# Altium PCB STM32F334R8T6-Module.PcbDoc
Units mm, origin at the board's own origin, x right, y up, seen from the top; angles counter-clockwise.
Board outline 37.95 x 40.32 mm, 2 copper layers (Top Layer, Bottom Layer); 20 components, 61 nets, 173 pads, 15 vias.
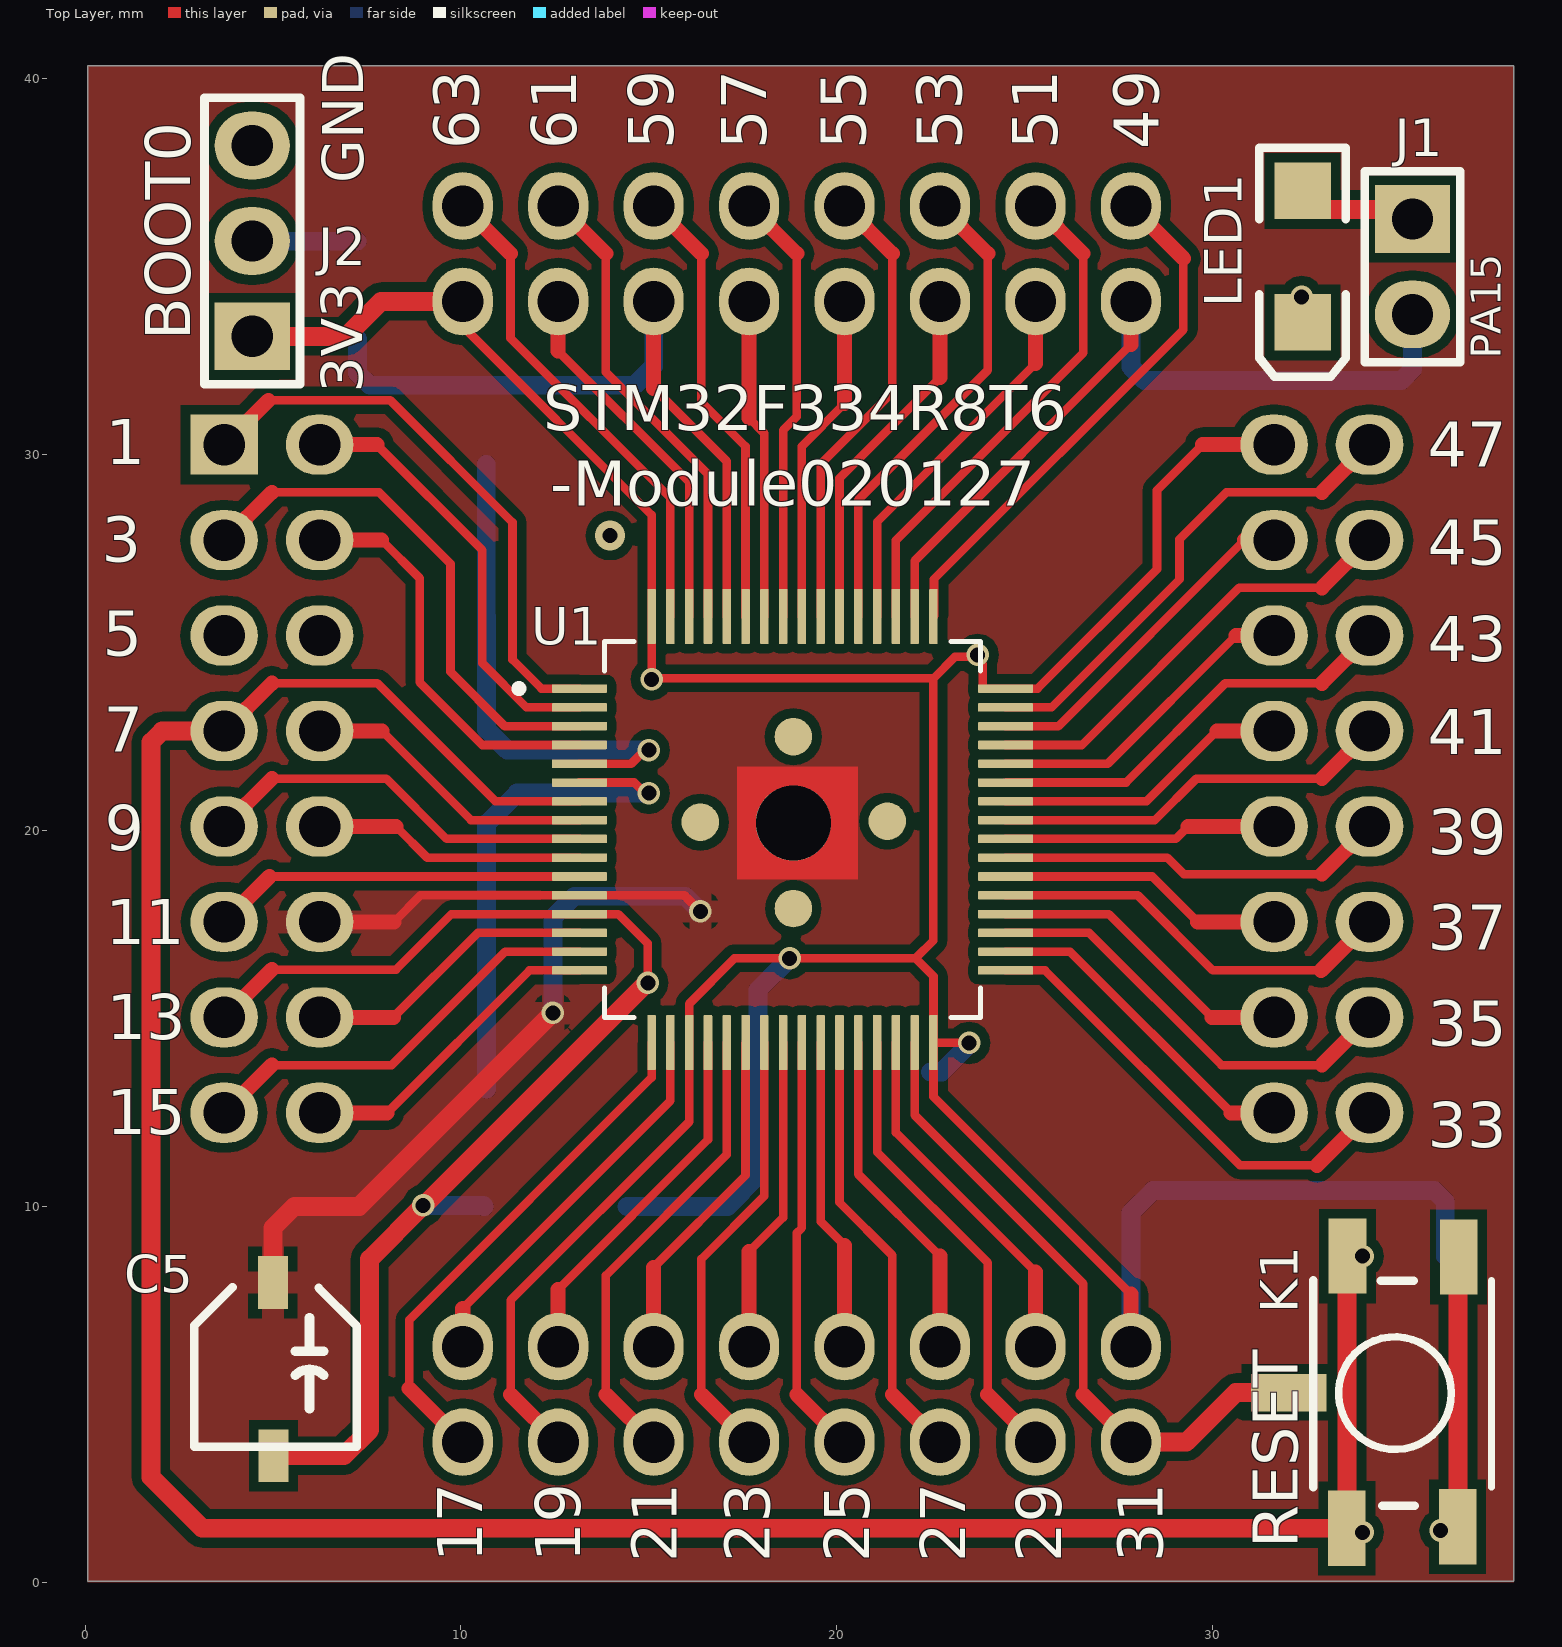
[diagram p0: Top Layer view]
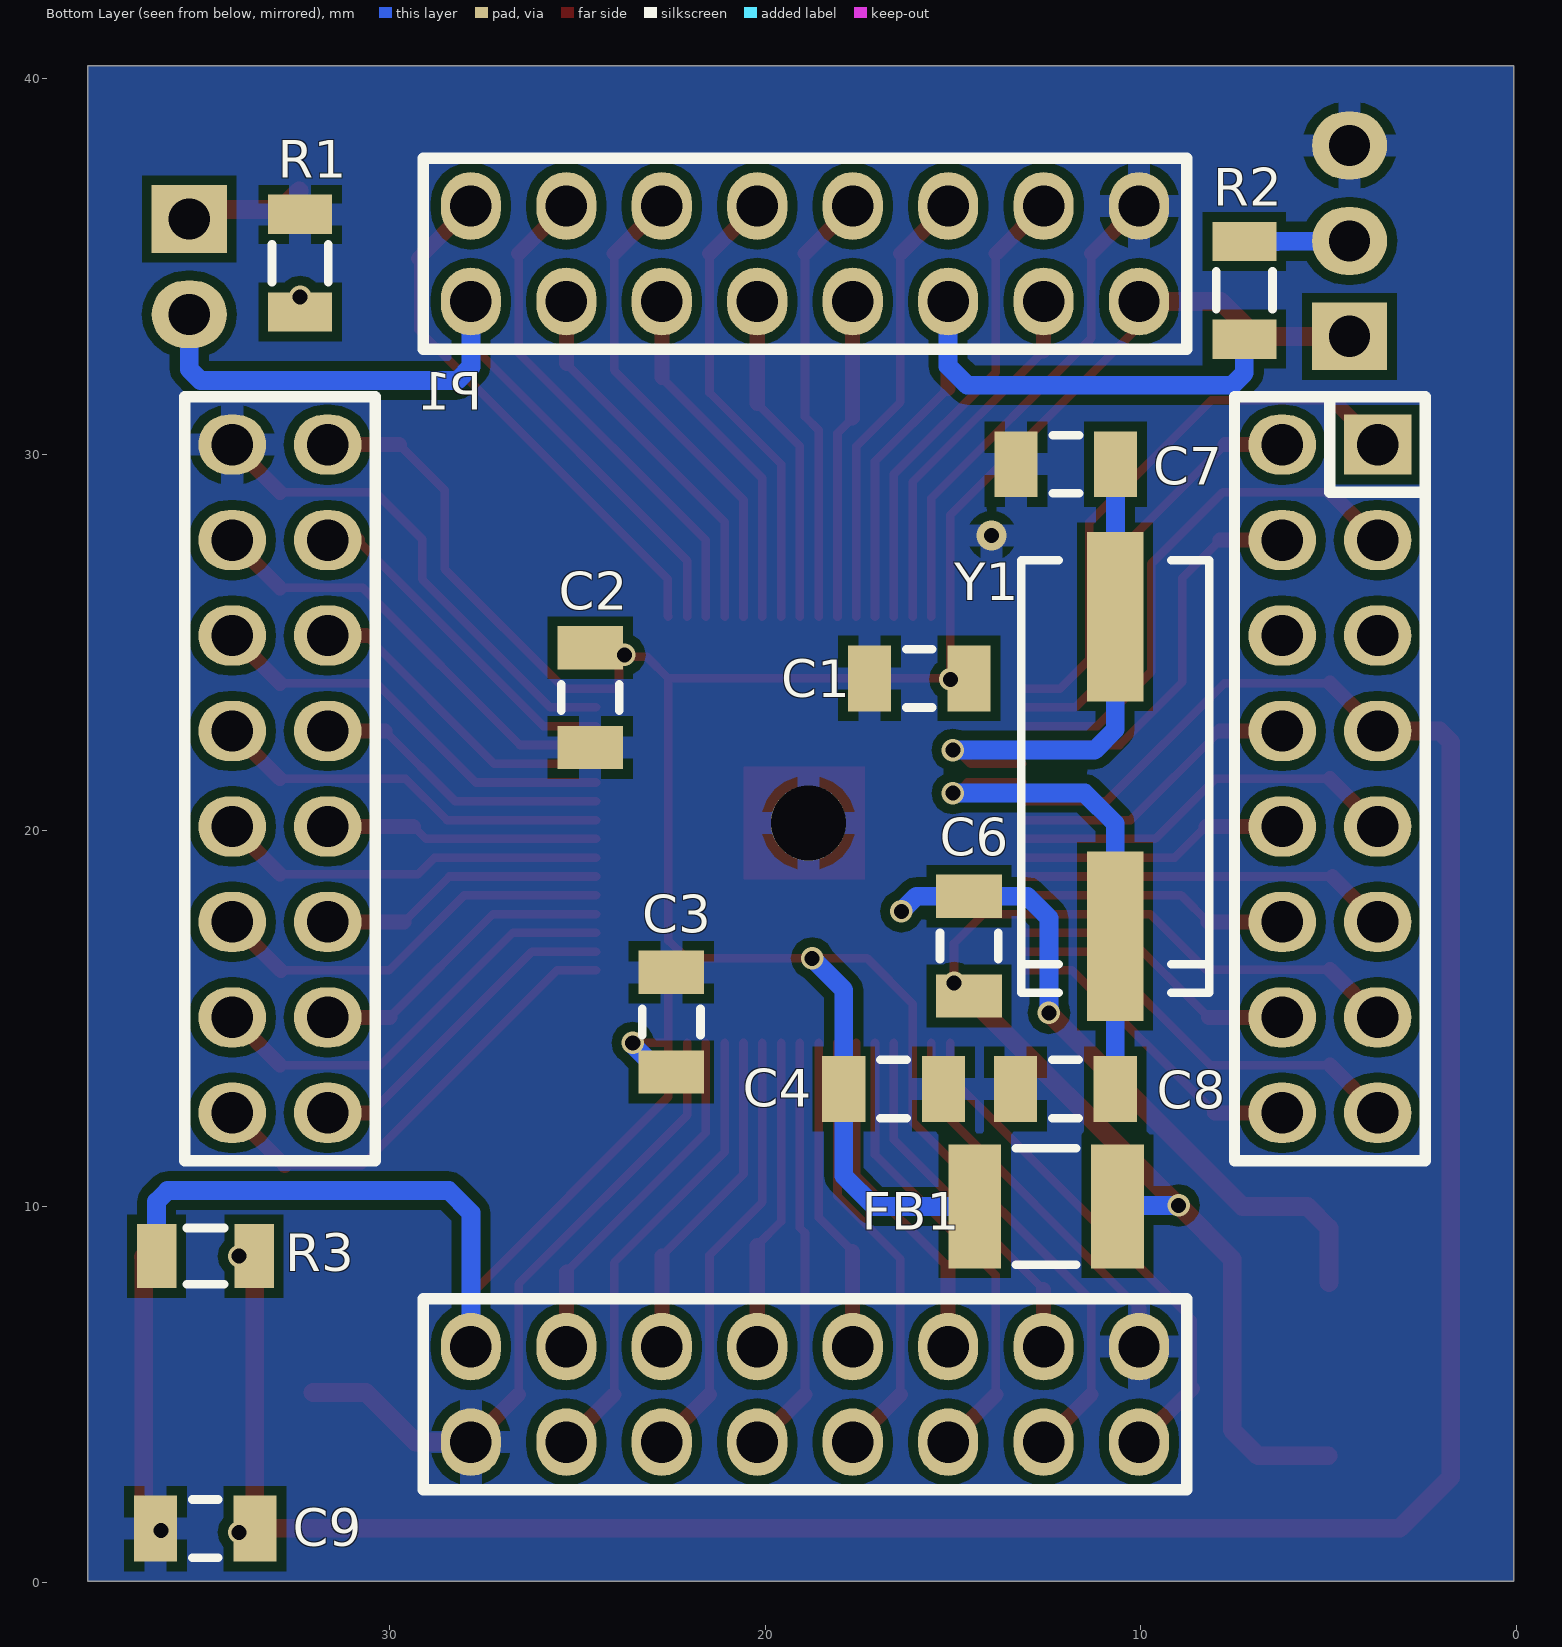
[diagram p1: Bottom Layer view, seen from below]
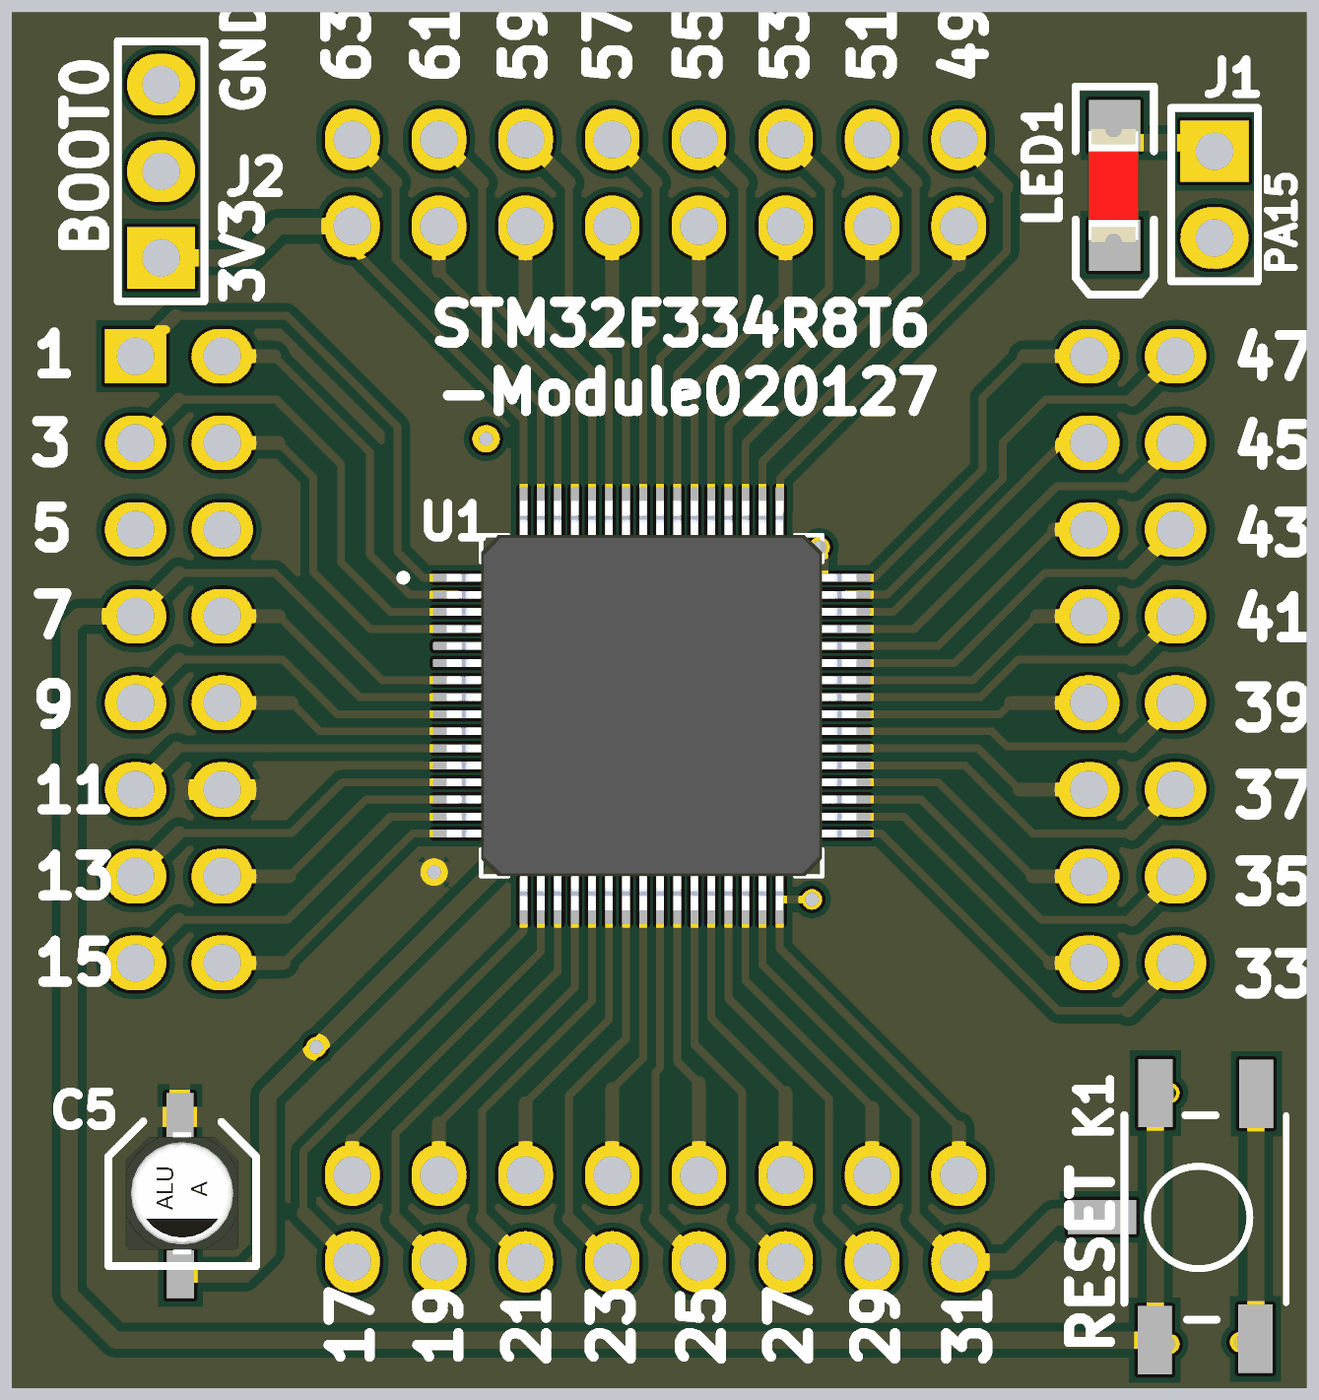
[diagram p2: 3D render of the assembled board from above, using the file's embedded part models]
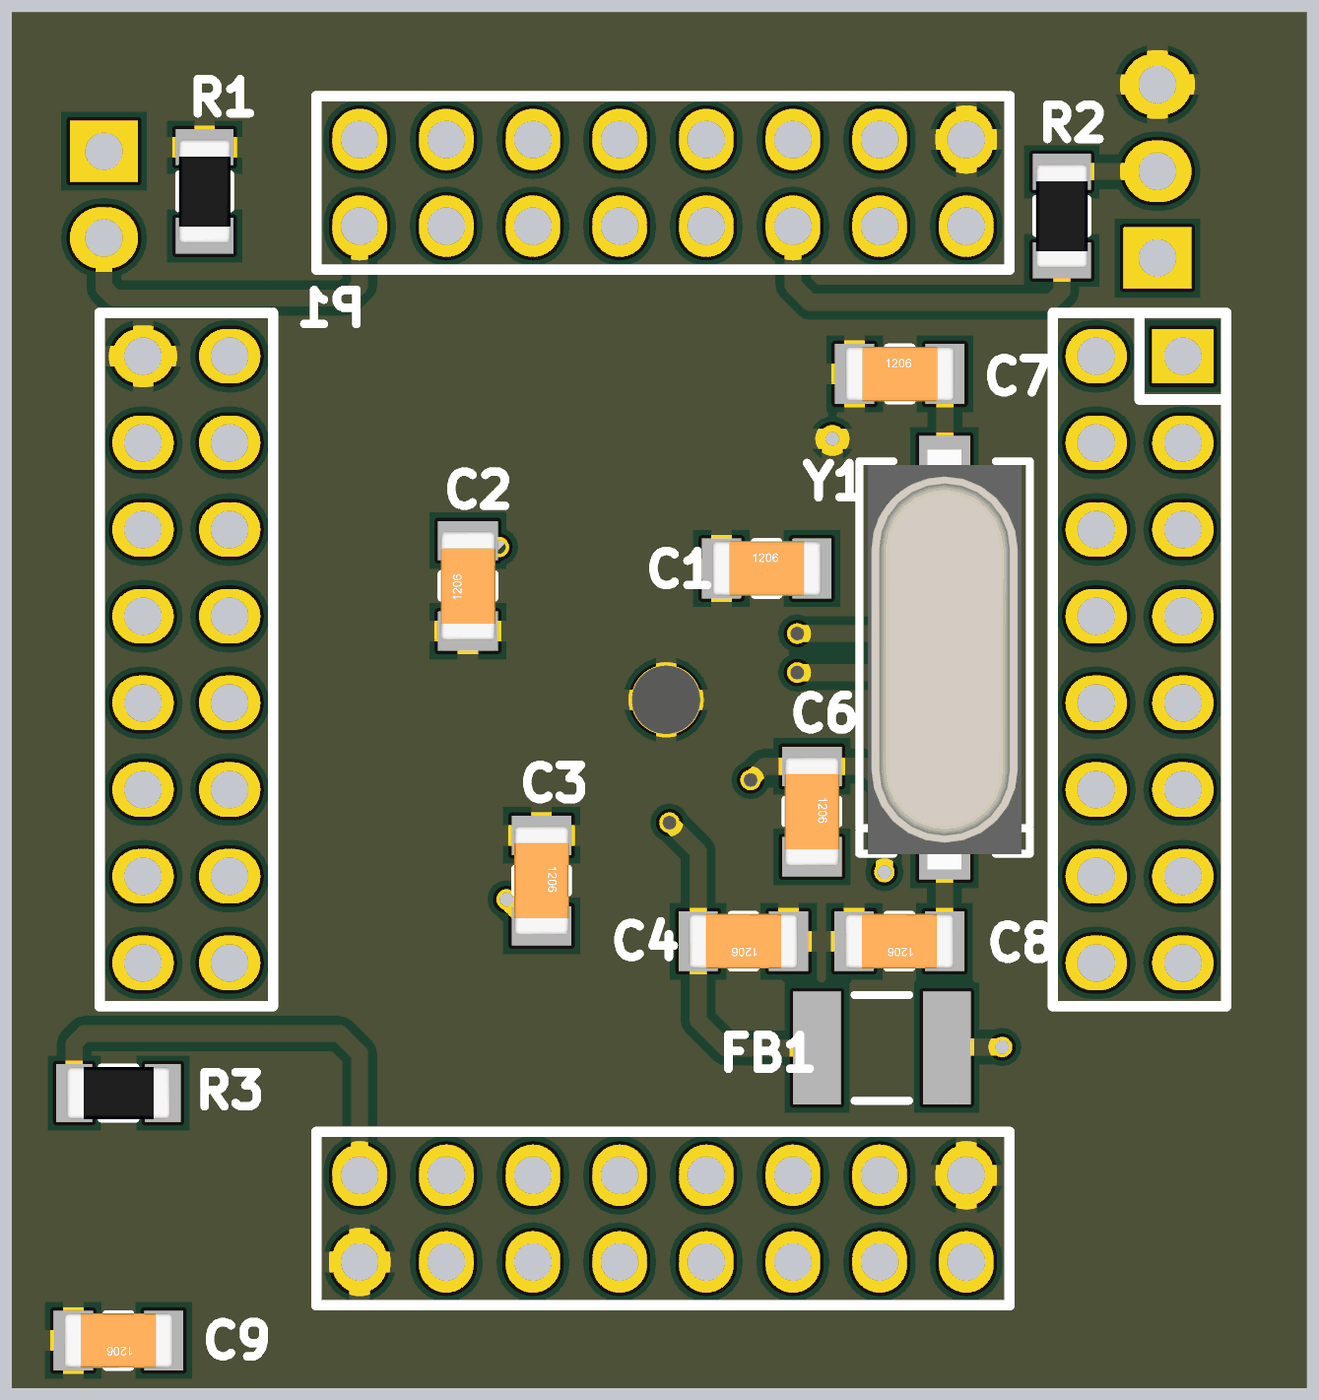
[diagram p3: 3D render of the assembled board from below, using the file's embedded part models]

## Layer stack, top to bottom
Top Solder: solder mask 0.0102, Solder Resist, Dk 3.5
Top Layer: signal copper 0.0356
Dielectric 1: dielectric 0.32, FR-4, Dk 4.8
Bottom Layer: signal copper 0.0356
Bottom Solder: solder mask 0.0102, Solder Resist, Dk 3.5

## Board outline
0.075,0.025 38.025,0.025 38.025,40.35 0.075,40.35

## Design rules (kind name [scope] priority, off if disabled: settings)
Clearance Clearance_2 [InNamedPolygon('Bottom Layer-GND')] p1: gap=0.254 ignorepadtopadclearanceinfootprint=FALSE except(0: Arc-Hole Track-Hole SMDPad-Hole THPad-Hole Via-Hole Fill-Hole Poly-Hole Region-Hole Text-Hole)
Clearance Clearance_1 [InNamedPolygon('Bottom Layer-GND')] p2: gap=0.254 ignorepadtopadclearanceinfootprint=FALSE except(0: Arc-Hole Track-Hole SMDPad-Hole THPad-Hole Via-Hole Fill-Hole Poly-Hole Region-Hole Text-Hole)
Clearance [All] p3: gap=0.254 ignorepadtopadclearanceinfootprint=FALSE except(0: Arc-Hole Track-Hole SMDPad-Hole THPad-Hole Via-Hole Fill-Hole Poly-Hole Region-Hole Text-Hole)
PlaneConnect [All] p1: planeconnectstyle=Relief reliefexpansion=0.508 reliefentries=4 reliefconductorwidth=0.6 reliefairgap=0.254
PolygonConnect [All] p1: connectstyle=Relief reliefconductorwidth=0.6 reliefentries=4 polygonreliefangle="90 Angle" airgapwidth=0.254
RoutingVias [All] p1: holewidth=0.711 width=1.27 viastyle="Through Hole" minholewidth=0.711 minwidth=1.27 maxholewidth=0.711 maxwidth=1.27
SolderMaskExpansion [All] p1: expansion=0.102
Width [All] p1: maxlimit=0.5 minlimit=0.2 preferedwidth=0.3 minimp=50.000000 maximp=50.000000 favimp=50.000000
29 further rules are at their usual default settings.

## Components (designator, comment, footprint, x,y, rotation, side; value= is the part's Value field where it differs from the comment)
C1 "Comment" "CAP 1206 (3216X15L)" 15.9,24.05 r180 bottom
C2 "Comment" "CAP 1206 (3216X15L)" 24.657,23.539 r90 bottom
C3 "Comment" "CAP 1206 (3216X15L)" 22.498,14.903 r270 bottom
C4 "Comment" "CAP 1206 (3216X15L)" 16.584,13.125 r0 bottom
C5 "10uf tantal" cap-e-2 5.09,4.585 r0 top
C6 "Comment" "CAP 1206 (3216X15L)" 14.575,16.925 r270 bottom
C7 "Comment" "CAP 1206 (3216X15L)" 12,29.75 r180 bottom
C8 "Comment" "CAP 1206 (3216X15L)" 12.012,13.125 r0 bottom
C9 "Comment" "CAP 1206 (3216X15L)" 34.9,1.425 r0 bottom
FB1 "Comment" INDC4532 12.525,10 r0 bottom
J1 "HDRM2" HDR1X2 35.325,36.275 r270 top
J2 "HDRM3" HDR1X3 4.45,33.15 r90 top
K1 "Push Button" "SW PB SMD" 33.575,8.65 r270 top
LED1 "HB" "LED SMD 1206" 32.4,35.275 r270 top
P1 "TQFP64IDC" TQFP64IDC 3.702,30.27 r0 bottom locked
R1 "1k" "RES 1206 (3216X08L)" 32.375,36.396 r270 bottom
R2 "Comment" "RES 1206 (3216X08L)" 7.25,33.079 r90 bottom
R3 "Comment" "RES 1206 (3216X08L)" 36.196,8.675 r180 bottom
U1 "STM32F334R8T6" STM32F334R8T6 11.528,23.778 r0 top
Y1 "8Mhz" "Crystal SMD" 10.687,20.872 r90 bottom

## Footprints (in the part's own frame and the unit in brackets; to place one, negate y for a bottom-side part, rotate by r counter-clockwise, add the part's x,y. Pads: shape width x height; smd on the part's side, far side on the other; paste and mask are expansions set on the pad)
"CAP 1206 (3216X15L)" [mm] "Chip Capacitor, 2-Leads, Body 3.2x1.6mm, IPC High Density"
  rect 1.15x1.75 smd: 1(-1.325,0) 2(1.325,0)
  silkscreen extent -0.35,-0.77 0.35,0.77, body extent -1.6,-0.8 1.6,0.8, height 1
cap-e-2 [mm] "1u-50v"
  rect 0.8x1.4 smd: 1(-0.075,-1.22) 2(-0.09,3.39)
  silkscreen extent -2.18,-0.98 2.14,3.26, body extent -1.68,-0.65 1.62,2.95, height 5.4
"Crystal SMD" [mm]
  rect 4.5x1.5 smd: 1(-3.683,0) 2(4.817,0)
  silkscreen extent -5.18,-2.5 6.32,2.5, body extent -5.64,-2.25 6.66,2.25, height 5.18
HDR1X2 [mm] "Connector; Header; 2 Position"
  rect 1.8x2 hole 1.1: 1(0,0)
  oval 1.8x2 hole 1.1: 2(2.54,0)
  silkscreen extent -1.27,-1.27 3.81,1.27
HDR1X3 [mm] "Connector; Header; 3 Position"
  rect 1.8x2 hole 1.1: 1(0,0)
  oval 1.8x2 hole 1.1: 2(2.54,0) 3(5.08,0)
  silkscreen extent -1.27,-1.27 6.35,1.27
INDC4532 [mm] "Chip Inductor, Body 4.5x3.2mm, IPC High Density"
  rect 1.4x3.3 smd: 1(-1.9,0) 2(1.9,0)
  silkscreen extent -0.8,-1.55 0.8,1.55, body extent -2.4,-1.7 2.4,1.7, height 0.55
"LED SMD 1206" [mm]
  rect 1.5x1.5 smd: 1(-1.75,0) 2(1.75,0)
  silkscreen extent -2.9,-1.15 3.2,1.15, body extent -1.65,-0.76 1.65,0.69, height 1.36
"RES 1206 (3216X08L)" [mm] "Chip Resistor, 2-Leads, Body 3.2x1.6mm, IPC High Density _ (0.125 W)"
  rect 1.05x1.7 smd: 1(0,0) 2(2.596,0)
  silkscreen extent 0.8,-0.75 1.8,0.75, body extent -0.23,-0.76 2.82,0.76, height 0.6
STM32F334R8T6 [mm]
  rrect25% 1.47x0.229 smd: 1(1.629,0) 2(1.629,-0.5) 3(1.629,-1) 4(1.629,-1.5) 5(1.629,-2) 6(1.629,-2.5) 7(1.629,-3) 8(1.629,-3.5) 9(1.629,-4) 10(1.629,-4.5) 11(1.629,-5) 12(1.629,-5.5) 13(1.629,-6) 14(1.629,-6.5) 15(1.629,-7) 16(1.629,-7.5) 33(12.969,-7.5) 34(12.969,-7) 35(12.969,-6.5) 36(12.969,-6) 37(12.969,-5.5) 38(12.969,-5) 39(12.969,-4.5) 40(12.969,-4) 41(12.969,-3.5) 42(12.969,-3) 43(12.969,-2.5) 44(12.969,-2) 45(12.969,-1.5) 46(12.969,-1) 47(12.969,-0.5) 48(12.969,0)
  rrect25% 0.229x1.47 smd: 17(3.549,-9.42) 18(4.049,-9.42) 19(4.549,-9.42) 20(5.049,-9.42) 21(5.549,-9.42) 22(6.049,-9.42) 23(6.549,-9.42) 24(7.049,-9.42) 25(7.549,-9.42) 26(8.049,-9.42) 27(8.549,-9.42) 28(9.049,-9.42) 29(9.549,-9.42) 30(10.049,-9.42) 31(10.549,-9.42) 32(11.049,-9.42) 49(11.049,1.92) 50(10.549,1.92) 51(10.049,1.92) 52(9.549,1.92) 53(9.049,1.92) 54(8.549,1.92) 55(8.049,1.92) 56(7.549,1.92) 57(7.049,1.92) 58(6.549,1.92) 59(6.049,1.92) 60(5.549,1.92) 61(5.049,1.92) 62(4.549,1.92) 63(4.049,1.92) 64(3.549,1.92)
  silkscreen extent -0.08,-8.75 12.3,1.25, body extent 1.3,-9.75 13.3,2.25, height 1.6
"SW PB SMD" [mm]
  rect 2x1 smd: 1(-0.005,2.975) 1(7.175,2.95) 2(-0.025,0.02) 2(7.215,0)
  rect 1x2 smd: 3(3.605,-1.545)
  silkscreen extent 0.62,-0.9 6.62,3.85
TQFP64IDC [mm]
  rect 1.8x1.6 hole 1.1: 1(0,0)
  oval 1.8x1.6 hole 1.1: 2(2.54,0) 3(0,2.54) 4(2.54,2.54) 5(0,5.08) 6(2.54,5.08) 7(0,7.62) 8(2.54,7.62) 9(0,10.16) 10(2.54,10.16) 11(0,12.7) 12(2.54,12.7) 13(0,15.24) 14(2.54,15.24) 15(0,17.78) 16(2.54,17.78) 33(30.48,17.78) 34(27.94,17.78) 35(30.48,15.24) 36(27.94,15.24) 37(30.48,12.7) 38(27.94,12.7) 39(30.48,10.16) 40(27.94,10.16) 41(30.48,7.62) 42(27.94,7.62) 43(30.48,5.08) 44(27.94,5.08) 45(30.48,2.54) 46(27.94,2.54) 47(30.48,0) 48(27.94,0)
  oval 1.6x1.8 hole 1.1: 17(6.35,26.543) 18(6.35,24.003) 19(8.89,26.543) 20(8.89,24.003) 21(11.43,26.543) 22(11.43,24.003) 23(13.97,26.543) 24(13.97,24.003) 25(16.51,26.543) 26(16.51,24.003) 27(19.05,26.543) 28(19.05,24.003) 29(21.59,26.543) 30(21.59,24.003) 31(24.13,26.543) 32(24.13,24.003) 49(24.13,-6.35) 50(24.13,-3.81) 51(21.59,-6.35) 52(21.59,-3.81) 53(19.05,-6.35) 54(19.05,-3.81) 55(16.51,-6.35) 56(16.51,-3.81) 57(13.97,-6.35) 58(13.97,-3.81) 59(11.43,-6.35) 60(11.43,-3.81) 61(8.89,-6.35) 62(8.89,-3.81) 63(6.35,-6.35) 64(6.35,-3.81)
  silkscreen extent -1.27,-7.62 31.75,27.81

## Part data
C1 C2 C3 C4 C6 C7 C8 C9: library part "Capacitor SMD"
C5: library part "Capacitor Tantalium"
FB1: library part "Ferrit Bead"
J1: library part HDR_M_1X2, "CONN, HEADER, Male, pitch: 2.54mm, 2POS"
J2: library part HDR_M_1X3, "CONN, HEADER, Male, pitch: 2.54mm, 3POS"
K1: library part "Push Kay"
LED1: library part LED, "LED", Adding Date=1387/12/22, Color=HB, Designer="Saeid Jorablo", Organazation=ControTec, Size="SMD 1206"
R1: library part R
R2 R3: library part "Resistor SMD"
U1: "No Description Available", Mfr_Name=STMicroelectronics, Copyright="Copyright (C) 2023 Ultra Librarian. All rights reserved.", Manufacturer_Part_Number=STM32F334R8T6, RefDes=RefDes, Type=DEV
Y1: library part Xtal

## Free pads (board coordinates)
  round 2 hole 2: 5(18.85,20.2)
  round 1 smd: 6(21.35,20.25) 7(18.85,22.5) 8(16.375,20.225) 9(18.85,17.925)

## Via types
v1: diameter 0.6, hole 0.4, Top Layer to Bottom Layer, 14 vias
v2: diameter 0.8, hole 0.4, Top Layer to Bottom Layer, 1 vias

## Nets (pads, with @x,y where several pads share a name; then routed paths per layer and width w, separated by ;. In a path a pad name is that pad's centre, name@x,y a point inside that pad or via, vN(x,y) a via of type N, cw(c..) or ccw(c..) an arc to the next point about the centre after c; other vN are vias at no path point)
+3V3: C1.2 C2.2 C3.2 C4.2 FB1.2 J2.1 P1.19 P1.32 P1.48 P1.64 R3.1 U1.19 U1.32 U1.48 U1.64 | length 106.8
  Top Layer w0.229: P1.64@10.052,33.423 15.077,28.398 U1.64 U1.64 v1@15.076,24.026 ; 11.325,4.994 11.325,7.5 16.077,12.252 U1.19 16.077,15.393 17.284,16.6 v1(18.75,16.6) 22.1,16.6 ; v1(15.075,24.025) v1@15.076,24.026 ; v1(23.525,14.35) 23.525,14.358 23.517,14.35 22.585,14.35 U1.32 ; 27.832,7.664 22.577,12.919 U1.32 ; 29.737,30.27 28.525,29.058 28.525,26.954 25.349,23.778 U1.48 23.905,23.778 23.891,23.792 23.891,24.426 23.75,24.567 v1(23.75,24.675) 23.7,24.625 23.15,24.625 22.575,24.05 ; v1@15.076,24.026 15.1,24.05 22.575,24.05 ; 22.1,16.6 22.575,17.075 22.575,24.05 ; 22.1,16.6 22.577,16.123 U1.32
  Top Layer w0.4: P1.64@10.052,33.423 P1.64 ; 11.325,4.994 P1.19 ; P1.32 27.832,7.664 ; 29.737,30.27 P1.48
  Top Layer w0.5: J2.1 6.95,33.15 7.88,34.08 P1.64
  Bottom Layer w0.5: FB1.2 17.1,10 17.909,10.809 C4.2 17.909,15.759 v1(18.75,16.6) ; C3.2 22.798,13.578 23.506,14.286 23.506,14.331 v1(23.525,14.35) ; P1.32 27.832,9.832 28.422,10.422 35.903,10.422 36.196,10.129 R3.1
AGND: C5.2 C6.1 P1.12 U1.12 | length 28.7
  Top Layer w0.229: 8.22,17.57 8.928,18.278 U1.12 15.947,18.278 v1(16.375,17.85)
  Top Layer w0.4: P1.12 8.22,17.57
  Top Layer w0.5: C5.2 5,9.425 5.575,10 7.3,10 v1(12.45,15.15)
  Bottom Layer w0.5: v1(12.45,15.15) 12.45,17.675 13.025,18.25 C6.1 15.975,18.25 v1(16.375,17.85)
BOOT0: P1.60 R2.1 U1.60 | length 20
  Top Layer w0.229: 15.132,31.77 17.077,29.825 U1.60
  Top Layer w0.4: 15.132,31.77 P1.60
  Bottom Layer w0.5: R2.1 7.25,32.175 7.575,31.85 14.625,31.85 15.132,32.357 P1.60
GND: C1.1 C2.1 C3.1 C4.1 C7.1 C8.2 C9.2 J2.3 K1.1 K1.3 P1.18 P1.31 P1.47 P1.63 pad.5 R1.1 U1.18 U1.31 U1.47 U1.63 | length 61.7
  Top Layer w0.229: 10.052,7.283 15.577,12.808 U1.18 ; 11.322,35.35 11.322,33.103 15.577,28.848 U1.63 ; U1.31 22.077,12.423 26.562,7.938 26.562,4.997 ; U1.47 25.72,23.278 29.125,26.683 29.125,27.75 30.375,29 32.912,29
  Top Layer w0.4: P1.18 10.052,7.283 ; P1.63 11.322,35.35 ; 26.562,4.997 P1.31 ; 32.912,29 P1.47
  Top Layer w0.5: P1.31 29.302,3.727 30.62,5.045 K1.3 ; K1.1@36.525,1.475 36.537,1.488 36.537,8.643 K1.1@36.55,8.655
  other v1: 36.075,1.375
  other v2: 13.975,27.85
MCU_RESET: C9.1 K1.2 P1.7 R3.2 U1.7 | length 72.4
  Top Layer w0.229: 4.972,23.92 7.78,23.92 10.922,20.778 U1.7
  Top Layer w0.4: P1.7 4.972,23.92
  Top Layer w0.5: P1.7 2.052,22.65 1.759,22.357 1.759,2.791 3.115,1.435 K1.2@33.485,1.435 ; K1.2@33.575,1.525 33.585,1.535 33.585,8.665 K1.2@33.595,8.675
  other v1: 34,1.325 34,8.675
NetJ1_1: J1.1 LED1.1 | length 3.2
  Top Layer w0.5: LED1.1 32.9,36.525 35.075,36.525 J1.1
NetJ2_2: J2.2 R2.2 | length 2.8
  Bottom Layer w0.5: J2.2@4.482,35.683 R2.2@7.242,35.683 ; 6.367,35.683 6.375,35.675
NetLED1_2: LED1.2 R1.2
  other v1: 32.375,34.2
OSC_IN: C7.2 U1.5 Y1.2 | length 13.6
  Top Layer w0.229: U1.5 14.533,21.778 14.897,22.142 v1(15.005,22.142)
  Bottom Layer w0.5: C7.2 10.675,25.701 Y1.2 10.687,22.689 11.234,22.142 v1(15.005,22.142)
OSC_OUT: C8.1 U1.6 Y1.1 | length 13.7
  Top Layer w0.229: U1.6 14.618,21.278 14.897,20.999 v1(15.005,20.999)
  Bottom Layer w0.5: C8.1 10.687,20.189 11.497,20.999 v1(15.005,20.999)
PA0: P1.14 U1.14 | length 7.8
  Top Layer w0.229: 8.205,15.03 10.453,17.278 U1.14
  Top Layer w0.4: P1.14 8.205,15.03
PA1: P1.15 U1.15 | length 11.2
  Top Layer w0.229: 4.972,13.76 8.16,13.76 11.178,16.778 U1.15
  Top Layer w0.4: P1.15 4.972,13.76
PA2: P1.16 U1.16 | length 8.5
  Top Layer w0.229: 8.04,12.49 11.828,16.278 U1.16
  Top Layer w0.4: P1.16 8.04,12.49
PA3: P1.17 U1.17 | length 13.9
  Top Layer w0.229: 8.625,5.154 8.625,6.975 15.077,13.427 U1.17
  Top Layer w0.4: 8.625,5.154 P1.17
PA4: P1.20 U1.20 | length 9.7
  Top Layer w0.229: 12.592,7.791 16.577,11.776 U1.20
  Top Layer w0.4: P1.20 12.592,7.791
PA5: P1.21 U1.21 | length 12.5
  Top Layer w0.229: 13.862,4.997 13.862,8.162 17.077,11.377 U1.21
  Top Layer w0.4: 13.862,4.997 P1.21
PA6: P1.22 U1.22 | length 9.1
  Top Layer w0.229: 15.132,8.378 17.577,10.823 U1.22
  Top Layer w0.4: P1.22 15.132,8.378
PA7: P1.23 U1.23 | length 11.9
  Top Layer w0.229: 16.402,4.997 16.402,8.602 18.077,10.277 U1.23
  Top Layer w0.4: 16.402,4.997 P1.23
PA8: P1.41 U1.41 | length 10.7
  Top Layer w0.229: U1.41 28.471,20.278 29.573,21.38 32.912,21.38
  Top Layer w0.4: 32.912,21.38 P1.41
PA9: P1.42 U1.42 | length 7.9
  Top Layer w0.229: U1.42 28.246,20.778 30.118,22.65
  Top Layer w0.4: 30.118,22.65 P1.42
PA10: P1.43 U1.43 | length 11.3
  Top Layer w0.229: U1.43 27.701,21.278 30.343,23.92 32.912,23.92
  Top Layer w0.4: 32.912,23.92 P1.43
PA11: P1.44 U1.44 | length 8.6
  Top Layer w0.229: U1.44 27.214,21.778 30.626,25.19
  Top Layer w0.4: 30.626,25.19 P1.44
PA12: P1.45 U1.45 | length 11.9
  Top Layer w0.229: U1.45 26.528,22.278 30.71,26.46 32.912,26.46
  Top Layer w0.4: 32.912,26.46 P1.45
PA13: P1.46 U1.46 | length 9.2
  Top Layer w0.229: U1.46 25.903,22.778 P1.46@30.855,27.73
  Top Layer w0.4: P1.46@30.855,27.73 P1.46
PA14: P1.49 U1.49 | length 14.3
  Top Layer w0.229: U1.49 22.591,25.712 22.591,26.691 29.229,33.329 29.229,35.223
  Top Layer w0.4: P1.49 29.229,35.223
PA15: J1.2 P1.50 U1.50 | length 21.7
  Top Layer w0.229: U1.50 22.077,27.182 27.832,32.937
  Top Layer w0.4: 27.832,32.937 P1.50
  Bottom Layer w0.5: P1.50 27.832,32.343 28.2,31.975 35.025,31.975 35.325,32.275 J1.2
PB0: P1.26 U1.26 | length 8.4
  Top Layer w0.229: U1.26 19.577,9.598 20.212,8.963
  Top Layer w0.4: P1.26 20.212,8.963
PB1: P1.27 U1.27 | length 11.7
  Top Layer w0.229: U1.27 20.077,10.106 21.482,8.701 21.482,4.997
  Top Layer w0.4: 21.482,4.997 P1.27
PB2: P1.28 U1.28 | length 9
  Top Layer w0.229: U1.28 20.577,10.855 22.752,8.68
  Top Layer w0.4: P1.28 22.752,8.68
PB3: P1.55 U1.55 | length 12.2
  Top Layer w0.229: U1.55 19.577,29.752 21.482,31.657 21.482,35.35
  Top Layer w0.4: P1.55 21.482,35.35
PB4: P1.56 U1.56 | length 8.9
  Top Layer w0.229: U1.56 19.077,30.227 20.212,31.362
  Top Layer w0.4: 20.212,31.362 P1.56
PB5: P1.57 U1.57 | length 11.6
  Top Layer w0.229: U1.57 18.577,30.652 18.942,31.017 18.942,35.35
  Top Layer w0.4: P1.57 18.942,35.35
PB6: P1.58 U1.58 | length 8.5
  Top Layer w0.229: 17.672,30.978 18.077,30.573 U1.58
  Top Layer w0.4: 17.672,30.978 P1.58
PB7: P1.59 U1.59 | length 11.9
  Top Layer w0.229: 16.402,35.35 16.402,31.398 17.577,30.223 U1.59
  Top Layer w0.4: P1.59 16.402,35.35
PB8: P1.61 U1.61 | length 12.6
  Top Layer w0.229: 13.862,35.35 13.862,32.199 16.577,29.484 U1.61
  Top Layer w0.4: P1.61 13.862,35.35
PB9: P1.62 U1.62 | length 9.8
  Top Layer w0.229: 12.592,32.758 16.077,29.273 U1.62
  Top Layer w0.4: 12.592,32.758 P1.62
PB10: P1.29 U1.29 | length 12.4
  Top Layer w0.229: U1.29 21.077,11.448 24.022,8.503 24.022,4.997
  Top Layer w0.4: 24.022,4.997 P1.29
PB11: P1.30 U1.30 | length 9.6
  Top Layer w0.229: U1.30 21.577,11.966 25.292,8.251
  Top Layer w0.4: P1.30 25.292,8.251
PB12: P1.33 U1.33 | length 12.4
  Top Layer w0.229: U1.33 25.547,16.278 30.732,11.093 32.785,11.093
  Top Layer w0.4: 32.785,11.093 P1.33
PB13: P1.34 U1.34 | length 8.9
  Top Layer w0.229: U1.34 26.211,16.778 30.499,12.49
  Top Layer w0.4: 30.499,12.49 P1.34
PB14: P1.35 U1.35 | length 11.7
  Top Layer w0.229: U1.35 26.722,17.278 30.24,13.76 32.912,13.76
  Top Layer w0.4: 32.912,13.76 P1.35
PB15: P1.36 U1.36 | length 8.3
  Top Layer w0.229: U1.36 27.243,17.778 29.991,15.03
  Top Layer w0.4: 29.991,15.03 P1.36
PC0: P1.8 U1.8 | length 7.9
  Top Layer w0.229: 7.9,22.65 10.272,20.278 U1.8
  Top Layer w0.4: P1.8 7.9,22.65
PC1: P1.9 U1.9 | length 10.6
  Top Layer w0.229: 4.972,21.38 8.02,21.38 9.622,19.778 U1.9
  Top Layer w0.4: P1.9 4.972,21.38
PC2: P1.10 U1.10 | length 7.3
  Top Layer w0.229: 8.274,20.11 9.106,19.278 U1.10
  Top Layer w0.4: P1.10 8.274,20.11
PC3: P1.11 U1.11 | length 10
  Top Layer w0.229: 4.91,18.778 U1.11
  Top Layer w0.4: P1.11 4.91,18.778
PC4: P1.24 U1.24 | length 8.5
  Top Layer w0.229: 17.672,8.797 18.577,9.702 U1.24
  Top Layer w0.4: P1.24 17.672,8.797
PC5: P1.25 U1.25 | length 11.2
  Top Layer w0.229: 18.942,4.997 18.942,9.293 19.077,9.428 U1.25
  Top Layer w0.4: 18.942,4.997 P1.25
PC6: P1.37 U1.37 | length 11
  Top Layer w0.229: U1.37 28.011,18.278 30.011,16.278 32.89,16.278
  Top Layer w0.4: 32.89,16.278 P1.37
PC7: P1.38 U1.38 | length 7.6
  Top Layer w0.229: U1.38 28.402,18.778 29.61,17.57
  Top Layer w0.4: 29.61,17.57 P1.38
PC8: P1.39 U1.39 | length 10.4
  Top Layer w0.229: U1.39 28.803,19.278 29.241,18.84 32.912,18.84
  Top Layer w0.4: 32.912,18.84 P1.39
PC9: P1.40 U1.40 | length 7.3
  Top Layer w0.229: U1.40 29.024,19.778 29.356,20.11
  Top Layer w0.4: 29.356,20.11 P1.40
PC10: P1.51 U1.51 | length 13.5
  Top Layer w0.229: U1.51 21.577,27.727 26.562,32.712 26.562,35.35
  Top Layer w0.4: P1.51 26.562,35.35
PC11: P1.52 U1.52 | length 10.1
  Top Layer w0.229: U1.52 21.077,28.214 25.292,32.429
  Top Layer w0.4: 25.292,32.429 P1.52
PC12: P1.53 U1.53 | length 12.9
  Top Layer w0.229: U1.53 20.577,28.802 24.022,32.247 24.022,35.35
  Top Layer w0.4: P1.53 24.022,35.35
PC13: P1.2 U1.2 | length 11.6
  Top Layer w0.229: 7.766,30.27 10.575,27.461 10.575,24.45 11.747,23.278 U1.2
  Top Layer w0.4: P1.2 7.766,30.27
PC14: P1.3 U1.3 | length 14.2
  Top Layer w0.229: 4.972,29 7.825,29 9.725,27.1 9.725,24.225 11.172,22.778 U1.3
  Top Layer w0.4: P1.3 4.972,29
PC15: P1.4 U1.4 | length 10.8
  Top Layer w0.229: 7.893,27.73 8.906,26.717 8.906,23.944 10.572,22.278 U1.4
  Top Layer w0.4: P1.4 7.893,27.73
PD2: P1.54 U1.54 | length 9.5
  Top Layer w0.229: U1.54 20.077,29.377 22.752,32.052
  Top Layer w0.4: 22.752,32.052 P1.54
V_BAT: P1.1 U1.1 | length 15.3
  Top Layer w0.229: 4.882,31.45 8.125,31.45 11.375,28.2 11.375,24.55 12.147,23.778 U1.1
  Top Layer w0.4: P1.1 4.882,31.45
VDDA: C5.1 C6.2 FB1.1 P1.13 U1.13 | length 33.3
  Top Layer w0.229: 4.972,16.3 8.275,16.3 9.753,17.778 U1.13 14.192,17.778 14.975,16.995 v1(14.975,15.95)
  Top Layer w0.4: P1.13 4.972,16.3
  Top Layer w0.5: C5.1 6.89,3.365 7.573,4.048 7.573,8.598 v1(9,10.025) ; v1@9,10 14.95,15.95 v1(14.975,15.95)
  Bottom Layer w0.5: v1(9,10.025) 10.6,10.025 FB1.1
pads on no net: P1.5 P1.6

## Polygon pours and split planes (outlines as drawn)
GND on Bottom Layer "Bottom Layer-GND" (solid, pour order 0): 0.075,40.35 38.025,40.35 38.025,0.025 0.075,0.025
no net on Top Layer "Top Layer-No Net" (solid, pour order 6): 20.725,21.6
AGND on Top Layer "Top Layer-GND" (solid, pour order 4): 0.075,40.35 38.025,40.35 38.025,0 0.075,0

## Other copper
Top Layer:
  rectangle net AGND: 17.35,18.7 20.575,21.7

## Silkscreen, mask and mechanical layers (free items; w line width, h text height)
Top Overlay:
  text "63" at 10.475,38.125 h1.2 r90
  text "61" at 13.075,38.125 h1.2 r90
  text "59" at 15.65,38.125 h1.2 r90
  text "57" at 18.125,38.125 h1.2 r90
  text "55" at 20.775,38.125 h1.2 r90
  text "53" at 23.325,38.125 h1.2 r90
  text "51" at 25.875,38.125 h1.2 r90
  text "49" at 28.575,38.125 h1.2 r90
  text "GND" at 7.4,37.225 h1.1 r90
  text "BOOT0" at 2.8,33.05 h1.2 r90
  text "PA15" at 37.675,32.55 h0.8 r90
  text "3V3" at 7.375,31.65 h1.1 r90
  text "STM32F334R8T6" at 12.2,30.65 h1.2
  text "1" at 0.55,29.75 h1.2
  text "47" at 35.725,29.675 h1.2
  text "-Module020127" at 12.375,28.65 h1.2
  text "3" at 0.45,27.15 h1.2
  text "45" at 35.725,27.075 h1.2
  text "5" at 0.475,24.65 h1.2
  text "43" at 35.725,24.5 h1.2
  text "7" at 0.5,22.1 h1.2
  text "41" at 35.725,22.025 h1.2
  text "9" at 0.525,19.475 h1.2
  text "39" at 35.725,19.375 h1.2
  text "11" at 0.55,16.975 h1.2
  text "37" at 35.725,16.825 h1.2
  text "13" at 0.575,14.45 h1.2
  text "35" at 35.725,14.275 h1.2
  text "15" at 0.575,11.925 h1.2
  text "33" at 35.725,11.575 h1.2
  text "RESET" at 32.275,0.9 h1.2 r90
  text "17" at 10.575,0.525 h1.2 r90
  text "19" at 13.175,0.525 h1.2 r90
  text "21" at 15.75,0.525 h1.2 r90
  text "23" at 18.225,0.525 h1.2 r90
  text "25" at 20.875,0.525 h1.2 r90
  text "27" at 23.425,0.525 h1.2 r90
  text "29" at 25.975,0.525 h1.2 r90
  text "31" at 28.675,0.525 h1.2 r90
Mechanical 1:
  lines w0.254: 0.1,0.025 0.1,40.325 37.975,40.325 37.975,0.025 0.1,0.025